# Altium PCB PCB_国产飞控 led端子 copy copy.pcbdoc (part 1 of 2)
Units mil, origin at the board's own origin, x right, y up, seen from the top; angles counter-clockwise.
Board outline 3467.18 x 2997.13 mil, 4 copper layers (Top Layer, Inner1, Inner2, Bottom Layer), stack 2.757 mil thick; 107 components, 163 nets, 527 pads, 148 vias.
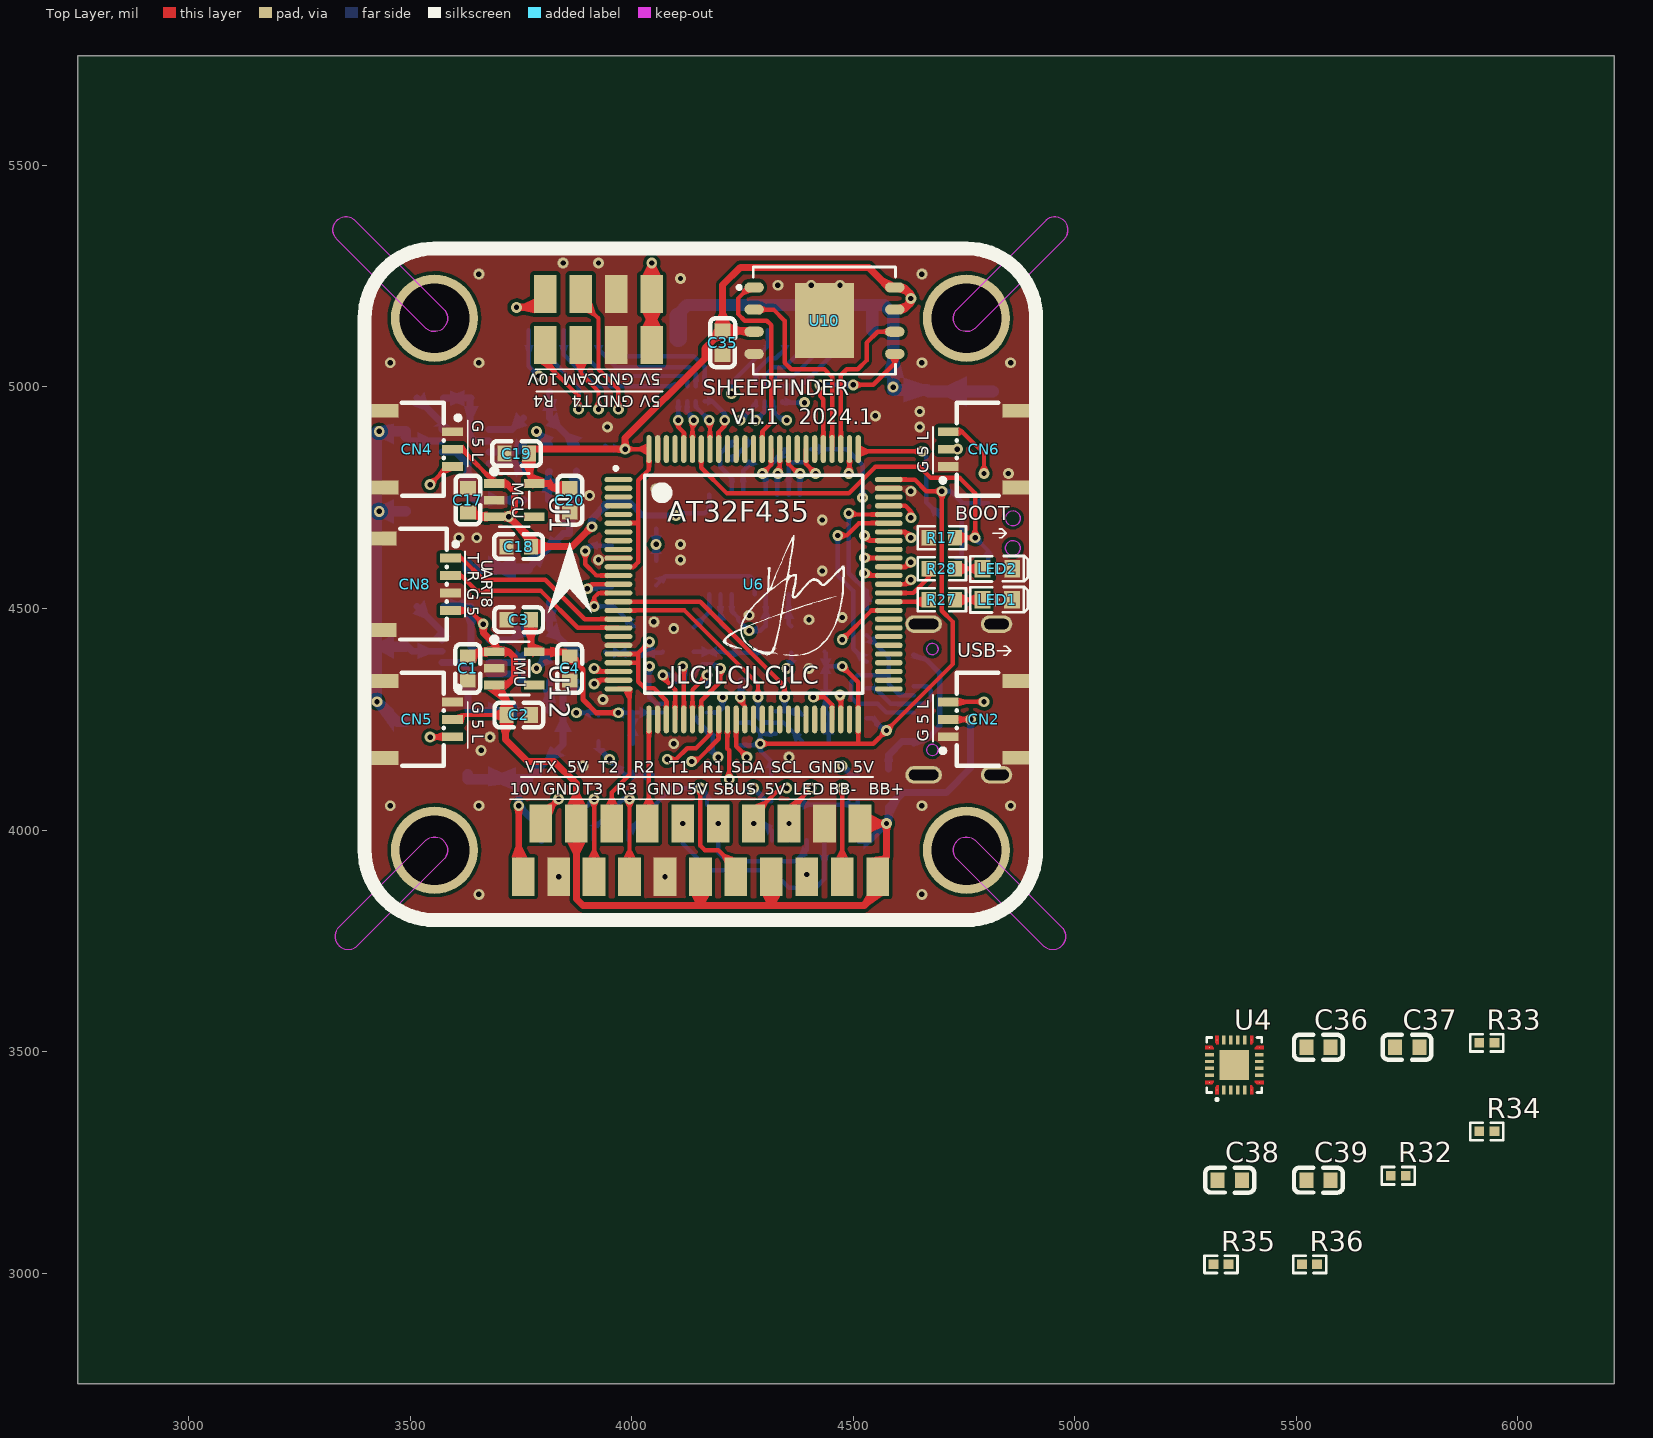
[diagram p0: Top Layer view]
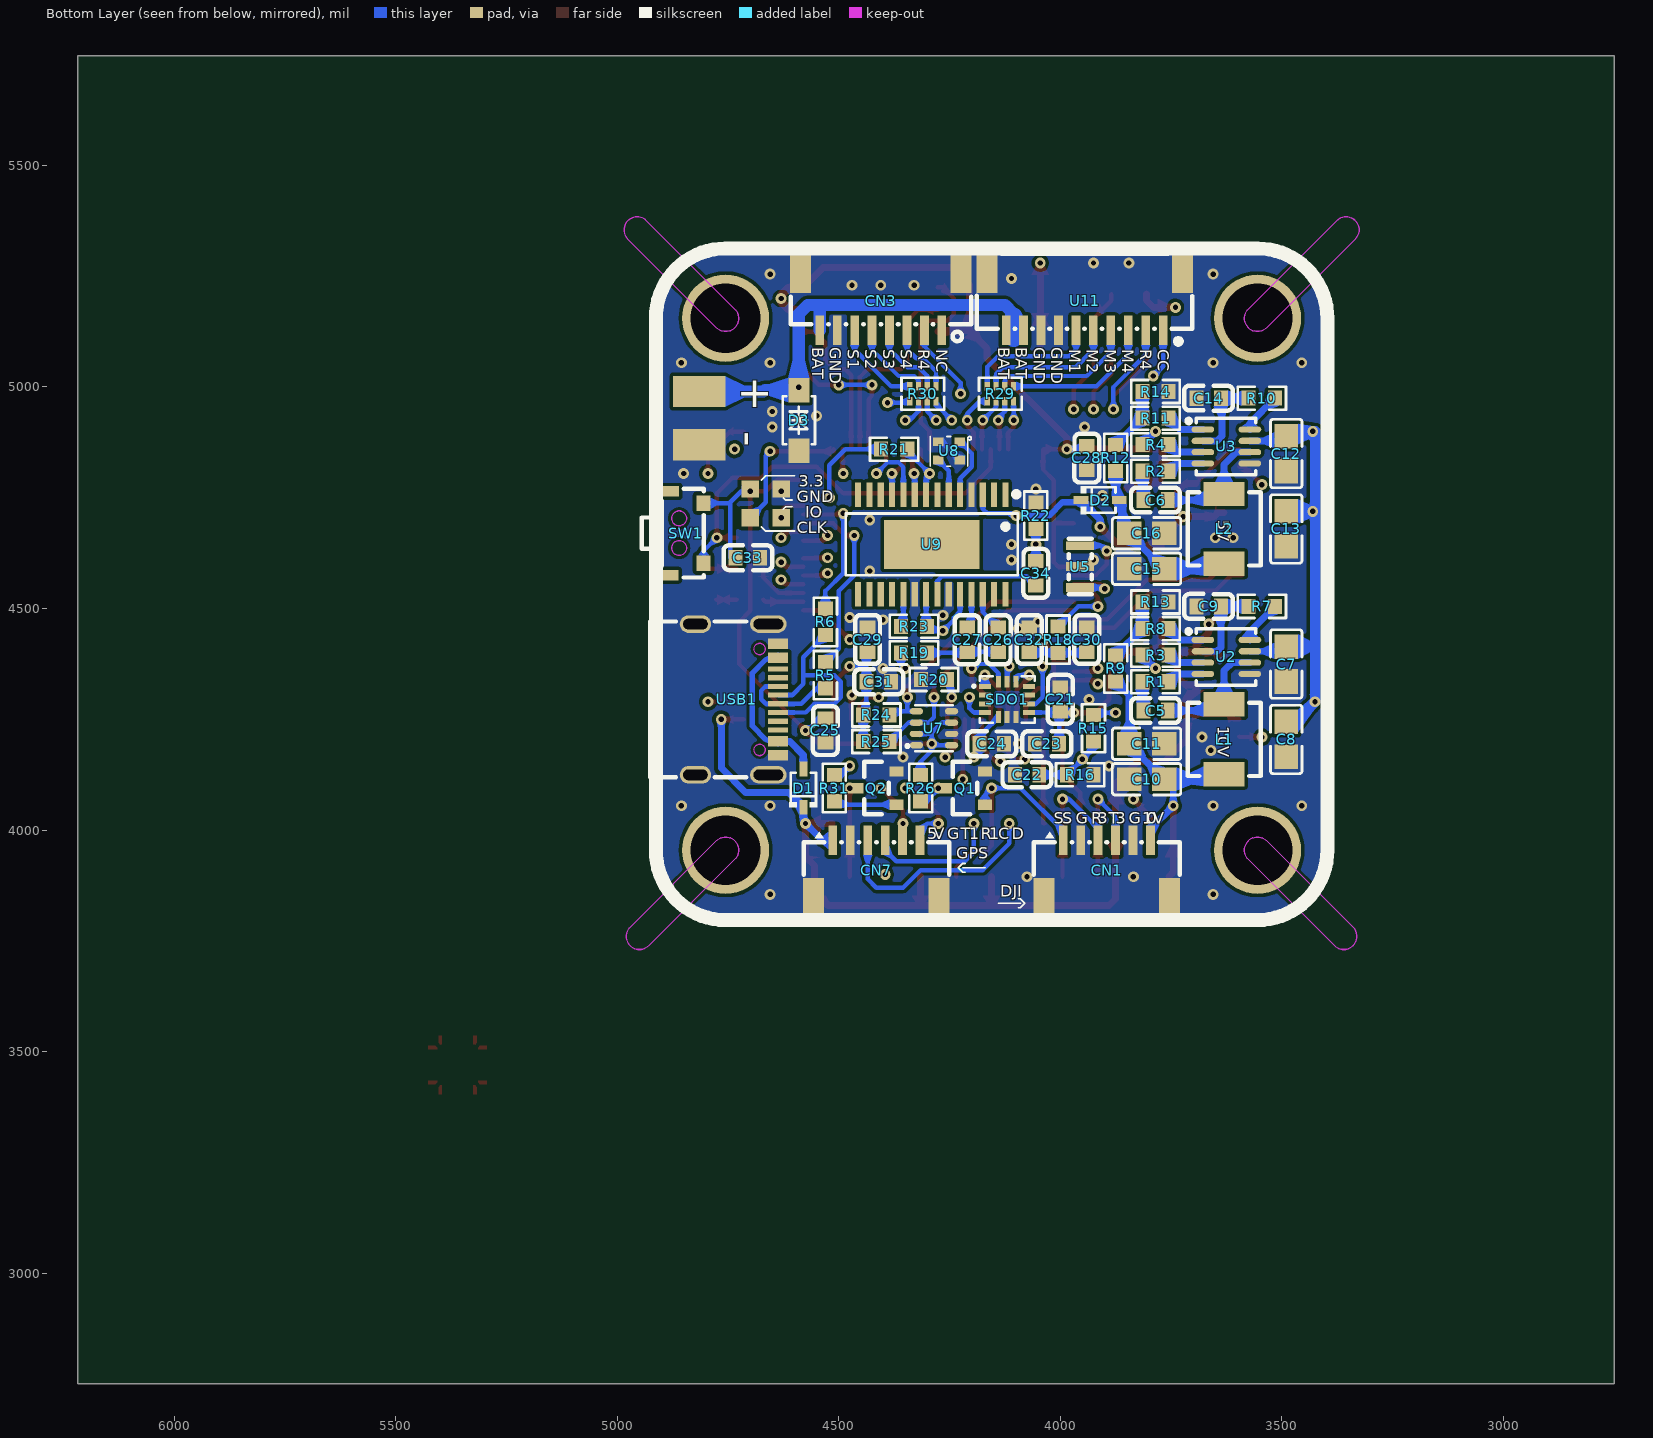
[diagram p1: Bottom Layer view, seen from below]
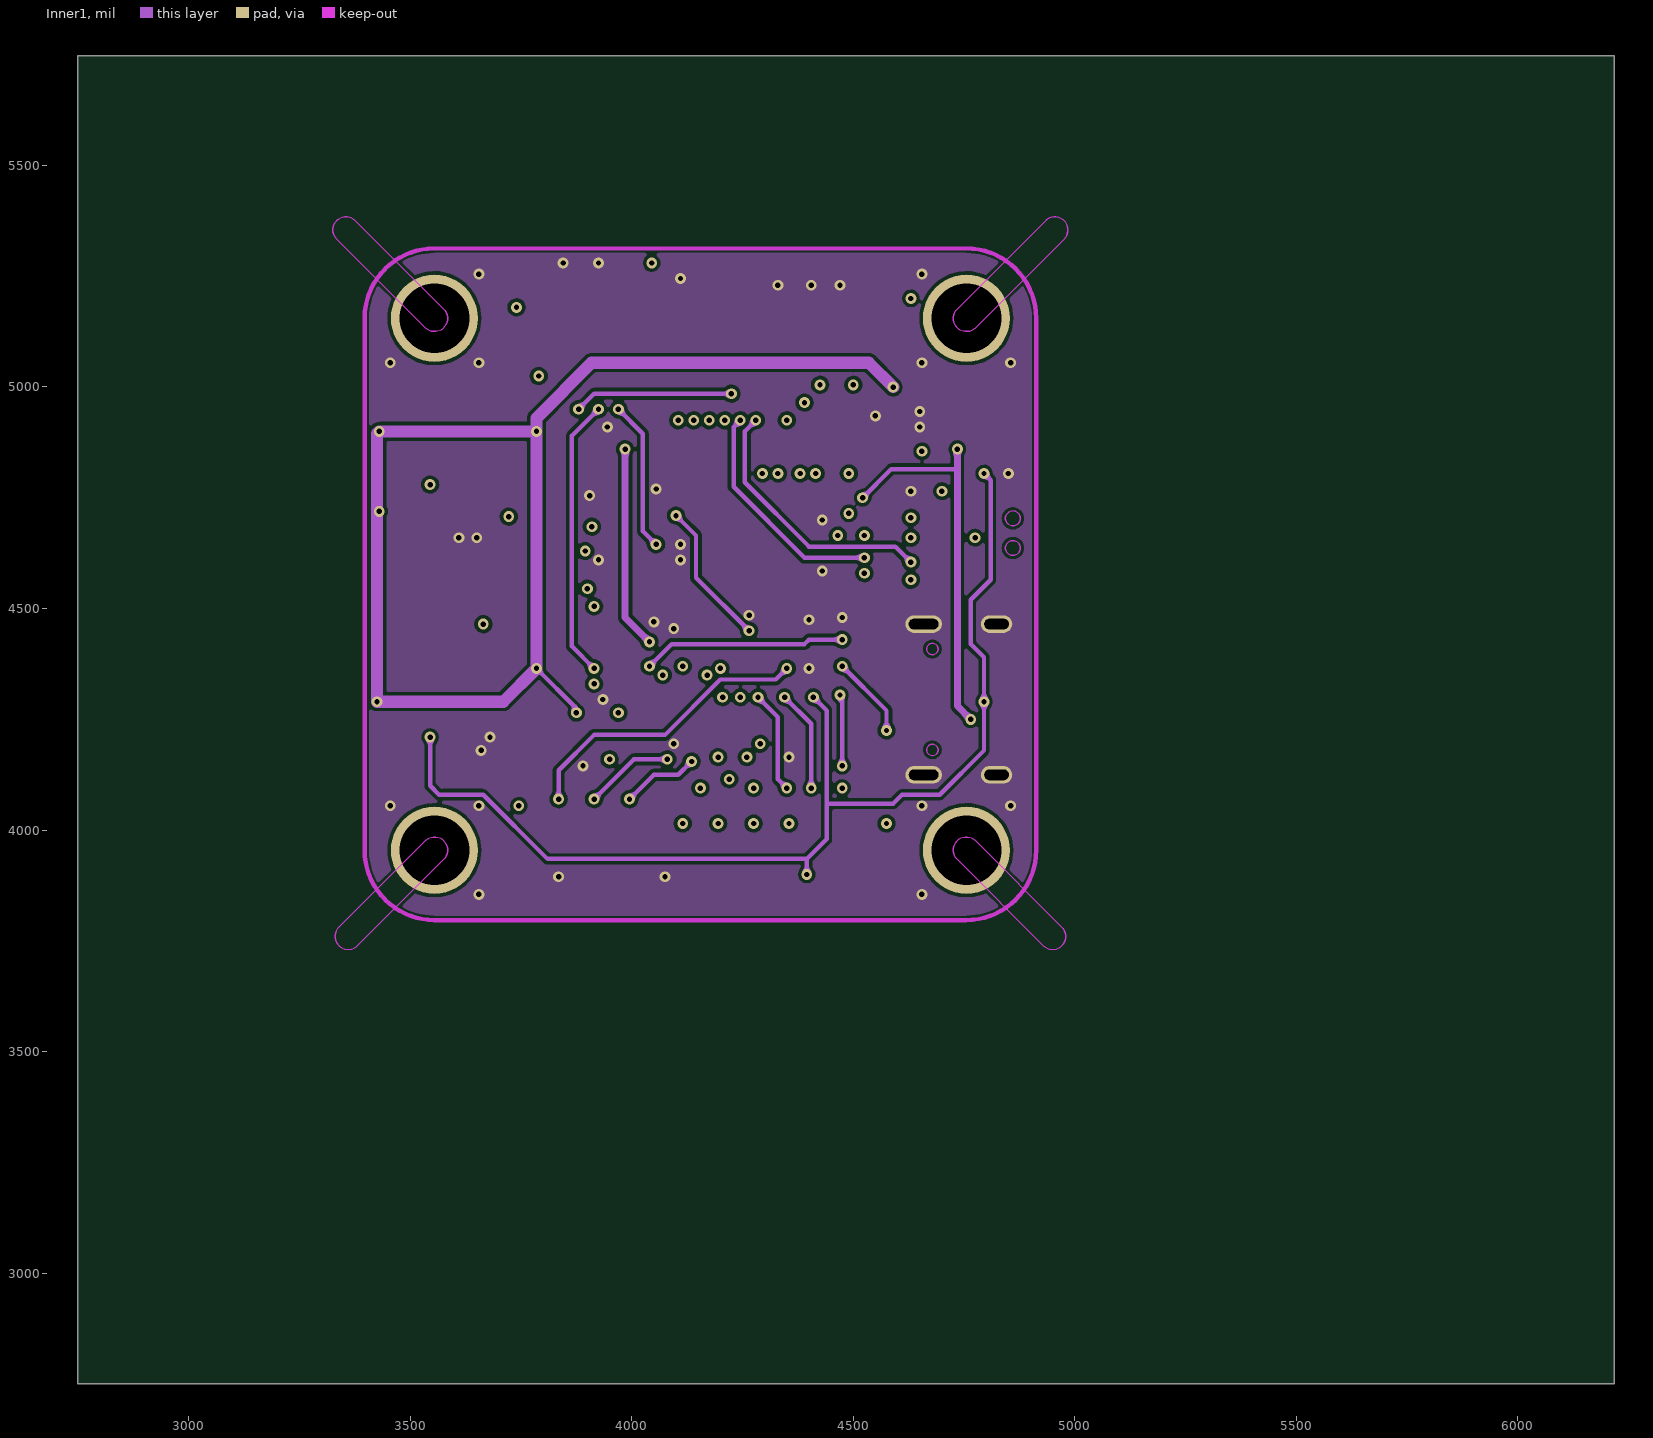
[diagram p2: Inner1]
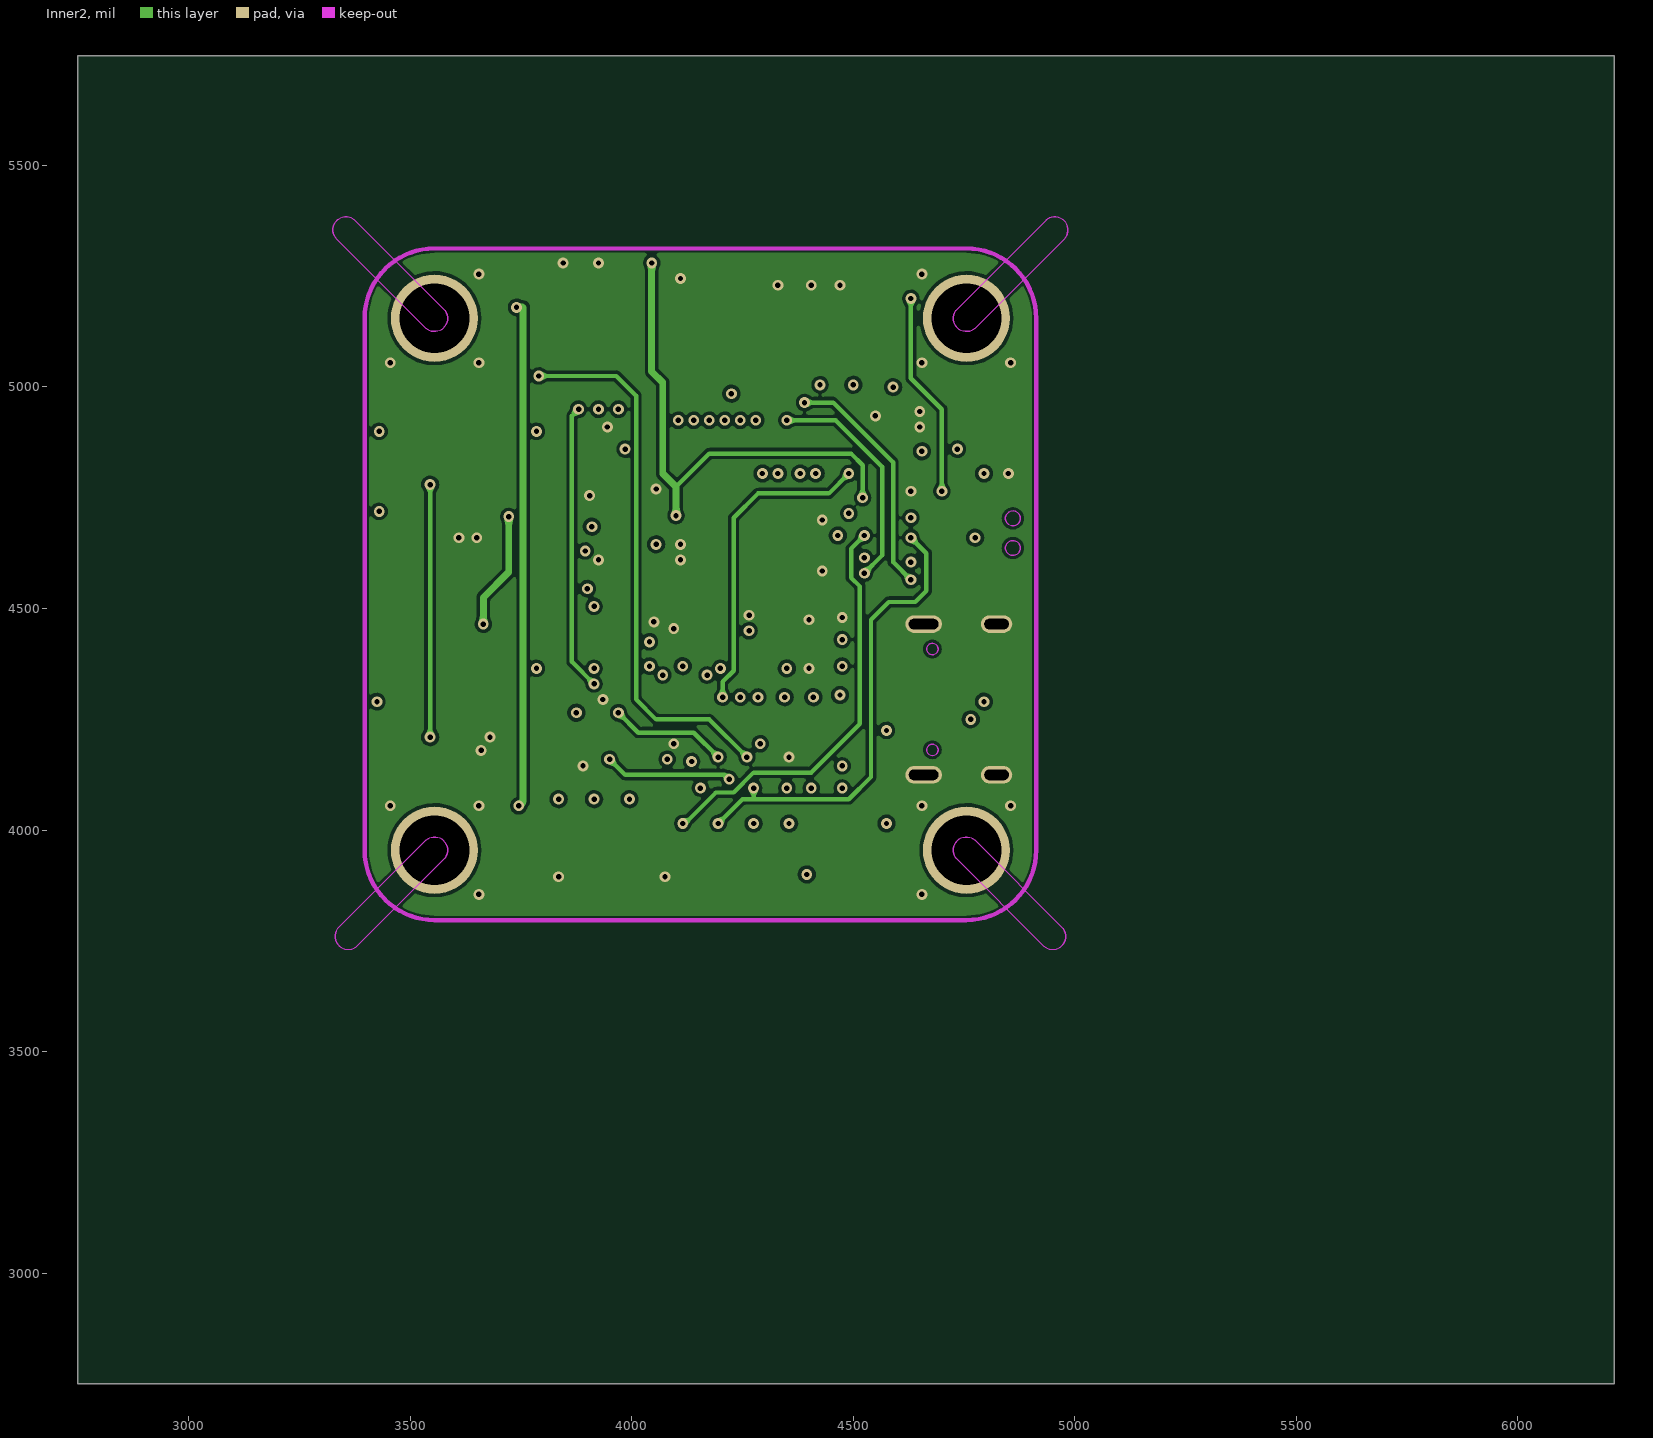
[diagram p3: Inner2]

## Layer stack, top to bottom
Top Solder Mask Layer: solder mask 0.394, Dk 3.3
Top Layer: signal copper 1.379
Inner1: signal copper (thickness not stored)
Inner2: signal copper (thickness not stored)
Bottom Layer: signal copper 1.378
Bottom Solder Mask Layer: solder mask 0.394, Dk 3.3

## Board outline
6217.18,2750 2750,2750 2750,5747.13 6217.18,5747.13

## Design rules (kind name [scope] priority, off if disabled: settings)
BoardOutlineClearance Default_1 [All] p1: gap=10 ignorepadtopadclearanceinfootprint=FALSE except(0: Arc-SplitContinuation Track-SplitContinuation SMDPad-SplitContinuation THPad-SplitContinuation Via-SplitContinuation Fill-SplitContinuation Poly-SplitContinuation Region-SplitContinuation Text-SplitContinuation)
BoardOutlineClearance otherClearance_1 [All] p2: gap=10 ignorepadtopadclearanceinfootprint=FALSE except(0: Arc-SplitContinuation Track-SplitContinuation SMDPad-SplitContinuation THPad-SplitContinuation Via-SplitContinuation Fill-SplitContinuation Poly-SplitContinuation Region-SplitContinuation Text-SplitContinuation)
Clearance Default [All] p1: gap=7 ignorepadtopadclearanceinfootprint=FALSE
Clearance otherClearance [All] p2: gap=7 ignorepadtopadclearanceinfootprint=FALSE
DiffPairsRouting differentialPair [All] p1: maxlimit=5 minlimit=5 mostfreqgap=6 toplayer_minwidth=5 toplayer_maxwidth=100 toplayer_prefwidth=100 midlayer1_minwidth=5 midlayer1_maxwidth=100 midlayer1_prefwidth=100 midlayer2_minwidth=5 midlayer2_maxwidth=100 midlayer2_prefwidth=100 bottomlayer_minwidth=5 bottomlayer_maxwidth=100 bottomlayer_prefwidth=100 maxuncoupledlength=10
PasteMaskExpansion pasteMaskExpansion [All] p1: expansion=0
PlaneConnect innerPlane [All] p1: planeconnectstyle=Relief reliefexpansion=20 reliefentries=4 reliefconductorwidth=10 reliefairgap=10
PolygonConnect copperRegion [All] p1: connectstyle=Relief reliefconductorwidth=10 reliefentries=4 polygonreliefangle="90 Angle" airgapwidth=10
RoutingVias Default_3 [All] p1: holewidth=12.01 width=12.01 viastyle="Through Hole" minholewidth=12.01 minwidth=12.01 maxholewidth=1181 maxwidth=1181
SolderMaskExpansion Common [All] p1: expansion=2 istentingtop=FALSE useseparateexpansions=TRUE expansionbottom=2 istentingbottom=FALSE
Width Default_2 [All] p1: maxlimit=1000 minlimit=10 preferedwidth=10
27 further rules are at their usual default settings.

## Components (designator, comment, footprint, x,y, rotation, side; value= is the part's Value field where it differs from the comment)
C1 "100nF" C0603 3630,4364.63 r90 top
C2 "10uF" C0603 3745,4259.63 r180 top
C3 "10uF" C0603 3745,4474.63 r0 top
C4 "100nF" C0603 3860,4364.63 r90 top
C5 "100nF" C0603 3785,4269.63 r180 bottom
C6 "100nF" C0603 3785,4744.63 r180 bottom
C7 "22u" C0805 3490,4374.63 r90 bottom
C8 "22u" C0805 3490,4204.63 r90 bottom
C9 "100nF" C0603 3665,4504.63 r180 bottom
C10 "22u" C0805 3805,4114.63 r180 bottom
C11 "22u" C0805 3805,4194.63 r0 bottom
C12 "22u" C0805 3490,4849.63 r90 bottom
C13 "22u" C0805 3490,4679.63 r90 bottom
C14 "100nF" C0603 3665,4974.63 r180 bottom
C15 "22u" C0805 3805,4589.63 r180 bottom
C16 "22u" C0805 3805,4669.63 r0 bottom
C17 "100nF" C0603 3630.3,4744.63 r270 top
C18 "10uF" C0603 3744.7,4639.63 r0 top
C19 "10uF" C0603 3740.3,4849.63 r0 top
C20 "100nF" C0603 3860.3,4744.63 r90 top
C21 "10nF" C0603 4000,4294.63 r270 bottom
C22 "100nF" C0603 4075,4124.63 r180 bottom
C23 "100nF" C0603 4030,4194.63 r180 bottom
C24 "2.2uF" C0603 4155,4194.63 r0 bottom
C25 "100nF" C0603 4530,4224.63 r90 bottom
C26 "10uF" C0603 4140,4429.63 r90 bottom
C27 "10uF" C0603 4210,4429.63 r90 bottom
C28 "100nF" C0603 3940,4839.63 r90 bottom
C29 "100nF" C0603 4435,4429.63 r270 bottom
C30 "100nF" C0603 3940,4429.63 r270 bottom
C31 "100nF" C0603 4410,4334.63 r0 bottom
C32 "100nF" C0603 4070,4429.63 r270 bottom
C33 "100nF" C0603 4705,4614.63 r0 bottom
C34 "100nF" C0603 4055,4579.63 r90 bottom
C35 "100nF" C0603 4205,5099.63 r270 top
C36 "100nF" C0603 5550,3509.63 r0 top
C37 "100nF" C0603 5750,3509.63 r0 top
C38 "100nF" C0603 5350,3209.63 r0 top
C39 "2.2uF" C0603 5550,3209.63 r0 top
CN1 "SH1.0X6P" CONN-SMD_6P-P1.00_MEGASTAR_ZX-SH1.0-6PWT 3895,3909.63 r180 bottom
CN2 "SH1.0-3P" CONN-SMD_3P-P1.00_HDGC_HDGC1002WR-S-3P 4795,4249.63 r90 top
CN3 "SH1.0X8P" CONN-SMD_8P-P1.00_WAFER-SH1.0-8PWB 4405,5194.63 r0 bottom
CN4 "SH1.0-3P" CONN-SMD_3P-P1.00_HDGC_HDGC1002WR-S-3P 3515,4859.63 r270 top
CN5 "SH1.0-3P" CONN-SMD_3P-P1.00_HDGC_HDGC1002WR-S-3P 3515,4249.63 r270 top
CN6 "SH1.0-3P" CONN-SMD_3P-P1.00_HDGC_HDGC1002WR-S-3P 4795,4859.63 r90 top
CN7 "SH1.0X6P" CONN-SMD_6P-P1.00_MEGASTAR_ZX-SH1.0-6PWT 4415,3909.63 r180 bottom
CN8 "HDGC1002WR-S-4P" CONN-SMD_4P-P1.00_HDGC_HDGC1002WR-S-4P 3510,4554.63 r270 top
D1 "B5817WS-MS" SOD-323_L1.7-W1.3-LS2.7-FD 4580,4094.63 r270 bottom
D2 "B5817WS-MS" SOD-323_L1.7-W1.3-LS2.7-FD 3910,4744.63 r0 bottom
D3 "SMF28CA" SOD-123_L2.7-W1.8-LS3.7-BI 4590,4924.63 r270 bottom
L1 "10uH" IND-SMD_L4.4-W4.0_PHC0420 3630,4204.63 r270 bottom
L2 "10uH" IND-SMD_L4.4-W4.0_PHC0420 3630,4679.63 r270 bottom
LED1 "LED-0603_G" LED0603_GREEN 4825,4519.63 r0 top
LED2 "LED-0603_B" LED0603_BLUE 4825.03,4589.6 r0 top
Q1 "S8050LT1-J3Y" SOT-23_L2.9-W1.3-P1.90-LS2.4-BR 4215,4094.63 r180 bottom
Q2 "S8050LT1-J3Y" SOT-23_L2.9-W1.3-P1.90-LS2.4-BR 4415,4094.63 r180 bottom
R1 "20R" R0603 3785,4334.63 r0 bottom
R2 "20R" R0603 3785,4809.63 r0 bottom
R3 "1M" R0603 3785,4394.63 r0 bottom
R4 "1M" R0603 3785,4869.63 r0 bottom
R5 "22R" R0603 4530,4349.63 r90 bottom
R6 "22R" R0603 4530,4469.63 r90 bottom
R7 "100k" R0603 3545,4504.63 r180 bottom
R8 "51k" R0603 3785,4454.63 r0 bottom
R9 "41.2k" R0603 3875,4364.63 r270 bottom
R10 "100k" R0603 3545,4974.63 r180 bottom
R11 "51k" R0603 3785,4929.63 r0 bottom
R12 "41.2k" R0603 3875,4839.63 r270 bottom
R13 "3.6k" R0603 3785,4514.63 r0 bottom
R14 "7.68k" R0603 3785,4989.63 r0 bottom
R15 "10k" R0603 3925,4229.63 r90 bottom
R16 "1k" R0603 3955,4124.63 r0 bottom
R17 "10k" R0603 4700,4659.63 r180 top
R18 "10k" R0603 4005,4429.63 r270 bottom
R19 "75R" R0603 4330,4399.63 r0 bottom
R20 "10k" R0603 4285,4339.63 r180 bottom
R21 "10k" R0603 4375,4859.63 r180 bottom
R22 "75R" R0603 4055,4709.63 r270 bottom
R23 "10k" R0603 4330,4459.63 r180 bottom
R24 "4K7" R0603 4415,4259.63 r0 bottom
R25 "4K7" R0603 4415,4199.63 r0 bottom
R26 "1k" R0603 4315,4094.63 r90 bottom
R27 "1k" R0603 4700,4519.63 r180 top
R28 "1k" R0603 4700,4589.63 r180 top
R29 "100*4" RES-ARRAY-SMD_0402-8P-L2.0-W1.0-BL 4135,4984.63 r0 bottom
R30 "100*4" RES-ARRAY-SMD_0402-8P-L2.0-W1.0-BL 4310,4984.63 r0 bottom
R31 "1k" R0603 4510,4094.63 r270 bottom
R32 "10kΩ" R0402 5730,3219.63 r0 top
R33 "10kΩ" R0402 5930,3519.63 r0 top
R34 "10kΩ" R0402 5930,3319.63 r0 top
R35 "10kΩ" R0402 5330,3019.63 r0 top
R36 "10kΩ" R0402 5530,3019.63 r0 top
SDO1 "BMI270" LGA-14_L3.0-W2.5-P0.50-TL 4120,4294.63 r180 bottom
SW1 "TS-1073B-A2B2-D4" KEY-SMD_TS-1073B-A2B2-D4 4845,4669.63 r90 bottom
U1 "SPX3819M5-L-3-3/TR" SOT-23-5_L3.0-W1.7-P0.95-LS2.8-BL 3735,4744.63 r270 top
U2 "MP9943" QFN-8-3X3 3625,4389.63 r180 bottom
U3 "MP9943" QFN-8-3X3 3625,4864.63 r180 bottom
U4 "MPU6500" QFN-24_L3.0-W3.0-P0.40-BL-EP 5360,3469.63 r0 top
U5 "8M/3213" X3213 3955,4594.63 r90 bottom
U6 "AT32F437VMT7-LQFP100" LQFP-100_L14.0-W14.0-P0.50-LS16.0-TL 4275,4554.63 r0 top
U7 "BMP280" SENSOR-TH_BMP280-BL 4285,4229.63 r180 bottom
U8 "2016晶振/27M" ? 4250,4854.63 r0 bottom
U9 "AT7456E" TSSOP-28_L9.7-W4.4-P0.65-LS6.4-BL-EP5.5 4290,4644.63 r0 bottom
U10 "W25N01GVZEIG" WSON-8_L8.0-W6.10-P1.27-EP 4435,5149.63 r0 top
U11 "ZX-SH1.0-10PWT" CONN-SMD_10P-P1.00_ZX-SH1.0-10PWT 3945,5194.63 r0 bottom locked
U12 "SPX3819M5-L-3-3/TR" SOT-23-5_L3.0-W1.7-P0.95-LS2.8-BL 3735,4364.63 r270 top
USB1 "TYPEC-304A-16L" USB-C-SMD_XUNPU_TYPEC-304A-ACP16L 4730,4294.63 r270 bottom

## Footprints (in the part's own frame and the unit in brackets; to place one, negate y for a bottom-side part, rotate by r counter-clockwise, add the part's x,y. Pads: shape width x height; smd on the part's side, far side on the other; paste and mask are expansions set on the pad)
C0603 [mm]
  rect 0.8x0.9 smd paste+0 mask+0.051: 1(-0.7,0) 2(0.7,0)
  silkscreen extent -1.41,-0.71 1.39,0.72
C0805 [mm]
  rect 1.41x1.35 smd paste-100 mask+0.051: 1(-1,0) 2(1,0)
  silkscreen extent -1.96,-0.9 1.96,0.9
CONN-SMD_3P-P1.00_HDGC_HDGC1002WR-S-3P [mm]
  rect 0.5x1.2 smd paste+0 mask+0.05: 1(-1,2.05) 2(0,2.05) 3(1,2.05)
  rect 0.8x2 smd paste+0 mask+0.05: 4(2.2,-2.05) 5(-2.2,-2.05)
  silkscreen extent -2.67,-2.72 2.67,2.48
CONN-SMD_4P-P1.00_HDGC_HDGC1002WR-S-4P [mm]
  rect 0.5x1.2 smd paste+0 mask+0.05: 1(-1.5,2.05) 2(-0.5,2.05) 3(0.5,2.05) 4(1.5,2.05)
  rect 0.8x2 smd paste+0 mask+0.05: 5(2.625,-2.05) 6(-2.625,-2.05)
  silkscreen extent -3.18,-2.72 3.17,2.49
CONN-SMD_6P-P1.00_MEGASTAR_ZX-SH1.0-6PWT [mm]
  rect 0.5x1.7 smd paste+0 mask+0.05: 1(-2.5,1.7) 2(-1.5,1.7) 3(-0.5,1.7) 4(0.5,1.7) 5(1.5,1.7) 6(2.5,1.7)
  rect 1.2x2.5 smd paste+0 mask+0.05: 7(3.6,-1.7) 8(-3.6,-1.7)
  silkscreen extent -4.17,-2.7 4.18,2.21
CONN-SMD_8P-P1.00_WAFER-SH1.0-8PWB [mm]
  rect 0.5x1.7 smd paste+0 mask+0.05: 1(-3.5,1.7) 2(-2.5,1.7) 3(-1.5,1.7) 4(-0.5,1.7) 5(0.5,1.7) 6(1.5,1.7) 7(2.5,1.7) 8(3.5,1.7)
  rect 1.2x2.5 smd paste+0 mask+0.05: 9(-4.6,-1.7) 10(4.6,-1.7)
  silkscreen extent -5.17,-2.95 5.17,2.32
CONN-SMD_10P-P1.00_ZX-SH1.0-10PWT [mm]
  rect 0.5x1.7 smd paste+0 mask+0.05: 1(-4.5,1.7) 2(-3.5,1.7) 3(-2.5,1.7) 4(-1.5,1.7) 5(-0.5,1.7) 6(0.5,1.7) 7(1.5,1.7) 8(2.5,1.7) 9(3.5,1.7) 10(4.5,1.7)
  rect 1.2x2.5 smd paste+0 mask+0.05: 11(5.6,-1.7) 12(-5.6,-1.7)
  silkscreen extent -6.18,-2.7 6.18,2.64
IND-SMD_L4.4-W4.0_PHC0420 [mm]
  rect 1.4x2.35 smd paste+0 mask+0.051: 1(-2,0) 2(2,0)
  silkscreen extent -2.1,-2.1 2.1,2.1
KEY-SMD_TS-1073B-A2B2-D4 [mm]
  rect 0.9x0.8 smd paste+0 mask+0.051: 1(-1.718,-1.013) 2(1.732,-1.013)
  rect 0.6x1.2 smd paste+0 mask+0.051: 3(-2.407,1.013) 4(2.407,0.987)
  Board Outline Layer circle w0.003: c0.857,0.387 r0.425
  Board Outline Layer circle w0.003: c-0.843,0.387 r0.425
  Board Outline Layer region: 0.857,0.812 0.772,0.812 0.616,0.747 0.496,0.627 0.432,0.471 0.432,0.302 0.496,0.146 0.616,0.026 0.772,-0.038 0.857,-0.038 0.941,-0.038 1.097,0.026 1.217,0.146 1.282,0.302 1.282,0.471 1.217,0.627 1.097,0.747 0.941,0.812 0.857,0.812
  Board Outline Layer region: 0.857,0.812 0.772,0.812 0.616,0.747 0.496,0.627 0.432,0.471 0.432,0.302 0.496,0.146 0.616,0.026 0.772,-0.038 0.857,-0.038 0.941,-0.038 1.097,0.026 1.217,0.146 1.282,0.302 1.282,0.471 1.217,0.627 1.097,0.747 0.941,0.812 0.857,0.812
  Board Outline Layer region: -0.843,0.812 -0.928,0.812 -1.084,0.747 -1.204,0.627 -1.268,0.471 -1.268,0.302 -1.204,0.146 -1.084,0.026 -0.928,-0.038 -0.843,-0.038 -0.759,-0.038 -0.603,0.026 -0.483,0.146 -0.418,0.302 -0.418,0.471 -0.483,0.627 -0.603,0.747 -0.759,0.812 -0.843,0.812
  Board Outline Layer region: -0.843,0.812 -0.928,0.812 -1.084,0.747 -1.204,0.627 -1.268,0.471 -1.268,0.302 -1.204,0.146 -1.084,0.026 -0.928,-0.038 -0.843,-0.038 -0.759,-0.038 -0.603,0.026 -0.483,0.146 -0.418,0.302 -0.418,0.471 -0.483,0.627 -0.603,0.747 -0.759,0.812 -0.843,0.812
  silkscreen extent -2.53,-1.03 2.55,2.53
LED0603_BLUE [mm]
  rect 0.9x1 smd paste+0 mask+0.051: 1(-0.85,0) 2(0.85,0)
  silkscreen extent -1.54,-0.73 1.75,0.73
LED0603_GREEN [mm]
  rect 0.9x1 smd paste+0 mask+0.051: 1(-0.85,0) 2(0.85,0)
  silkscreen extent -1.54,-0.73 1.75,0.73
LGA-14_L3.0-W2.5-P0.50-TL [mm]
  rect 0.675x0.28 smd paste+0 mask+0.051: 1(-1.262,0.75) 2(-1.262,0.25) 3(-1.262,-0.25) 4(-1.262,-0.75) 8(1.262,-0.75) 9(1.262,-0.25) 10(1.262,0.25) 11(1.262,0.75)
  rect 0.28x0.675 smd paste+0 mask+0.051: 5(-0.5,-1.012) 6(0,-1.012) 7(0.5,-1.012) 12(0.5,1.012) 13(0,1.012) 14(-0.5,1.012)
  silkscreen extent -1.98,-1.33 1.58,1.33
LQFP-100_L14.0-W14.0-P0.50-LS16.0-TL [mm]
  oval 1.6x0.3 smd paste+0 mask+0.051: 1(-7.75,6) 2(-7.75,5.5) 3(-7.75,5) 4(-7.75,4.5) 5(-7.75,4) 6(-7.75,3.5) 7(-7.75,3) 8(-7.75,2.5) 9(-7.75,2) 10(-7.75,1.5) 11(-7.75,1) 12(-7.75,0.5) 13(-7.75,0) 14(-7.75,-0.5) 15(-7.75,-1) 16(-7.75,-1.5) 17(-7.75,-2) 18(-7.75,-2.5) 19(-7.75,-3) 20(-7.75,-3.5) 21(-7.75,-4) 22(-7.75,-4.5) 23(-7.75,-5) 24(-7.75,-5.5) 25(-7.75,-6) 51(7.75,-6) 52(7.75,-5.5) 53(7.75,-5) 54(7.75,-4.5) 55(7.75,-4) 56(7.75,-3.5) 57(7.75,-3) 58(7.75,-2.5) 59(7.75,-2) 60(7.75,-1.5) 61(7.75,-1) 62(7.75,-0.5) 63(7.75,0) 64(7.75,0.5) 65(7.75,1) 66(7.75,1.5) 67(7.75,2) 68(7.75,2.5) 69(7.75,3) 70(7.75,3.5) 71(7.75,4) 72(7.75,4.5) 73(7.75,5) 74(7.75,5.5) 75(7.75,6)
  oval 0.3x1.6 smd paste+0 mask+0.051: 26(-6,-7.75) 27(-5.5,-7.75) 28(-5,-7.75) 29(-4.5,-7.75) 30(-4,-7.75) 31(-3.5,-7.75) 32(-3,-7.75) 33(-2.5,-7.75) 34(-2,-7.75) 35(-1.5,-7.75) 36(-1,-7.75) 37(-0.5,-7.75) 38(0,-7.75) 39(0.5,-7.75) 40(1,-7.75) 41(1.5,-7.75) 42(2,-7.75) 43(2.5,-7.75) 44(3,-7.75) 45(3.5,-7.75) 46(4,-7.75) 47(4.5,-7.75) 48(5,-7.75) 49(5.5,-7.75) 50(6,-7.75) 76(6,7.75) 77(5.5,7.75) 78(5,7.75) 79(4.5,7.75) 80(4,7.75) 81(3.5,7.75) 82(3,7.75) 83(2.5,7.75) 84(2,7.75) 85(1.5,7.75) 86(1,7.75) 87(0.5,7.75) 88(0,7.75) 89(-0.5,7.75) 90(-1,7.75) 91(-1.5,7.75) 92(-2,7.75) 93(-2.5,7.75) 94(-3,7.75) 95(-3.5,7.75) 96(-4,7.75) 97(-4.5,7.75) 98(-5,7.75) 99(-5.5,7.75) 100(-6,7.75)
  silkscreen extent -8,-6.25 6.25,6.75
QFN-8-3X3 [mm]
  oval 1.3x0.35 smd paste+0 mask+0.051: 1(-1.349,1.001) 2(-1.349,0.351) 3(-1.349,-0.3) 4(-1.349,-0.95) 5(1.346,-0.95) 6(1.346,-0.3) 7(1.346,0.351) 8(1.349,1.001)
  silkscreen extent -2.29,-1.6 1.68,1.64
QFN-24_L3.0-W3.0-P0.40-BL-EP [mm]
  round 0.04 smd: 1(-1,-1.428) 6(1,-1.428) 7(1.428,-1) 12(1.428,1) 13(1,1.428) 18(-1,1.428) 19(-1.428,1) 24(-1.428,-1)
  rect 0.2x0.505 smd paste-100 mask+0.051: 2(-0.6,-1.428) 3(-0.2,-1.428) 4(0.2,-1.428) 5(0.6,-1.428) 14(0.6,1.428) 15(0.2,1.428) 16(-0.2,1.428) 17(-0.6,1.428)
  rect 0.505x0.2 smd paste-100 mask+0.051: 8(1.428,-0.6) 9(1.428,-0.2) 10(1.428,0.2) 11(1.428,0.6) 20(-1.428,0.6) 21(-1.428,0.2) 22(-1.428,-0.2) 23(-1.428,-0.6)
  rect 1.7x1.7 smd paste-100 mask+0.051: 25(0,0)
  Top Layer region: -1.68,1.1 -1.274,1.1 -1.174,1 -1.175,0.9 -1.68,0.9
  Top Layer region: 1.1,-1.68 0.9,-1.68 0.9,-1.175 1,-1.175 1.1,-1.275
  Top Layer region: -1.1,-1.68 -0.9,-1.68 -0.9,-1.175 -1,-1.174 -1.1,-1.275
  Top Layer region: 1.1,1.68 0.9,1.68 0.9,1.175 1,1.174 1.1,1.274
  Top Layer region: 1.68,1.1 1.274,1.1 1.174,1 1.175,0.9 1.68,0.9
  Top Layer region: 1.68,-1.1 1.275,-1.1 1.175,-1 1.175,-0.9 1.68,-0.9
  Top Layer region: -1.68,-1.1 -1.274,-1.1 -1.174,-1 -1.175,-0.9 -1.68,-0.9
  Top Layer region: -1.1,1.68 -0.9,1.68 -0.9,1.175 -1,1.174 -1.1,1.274
  silkscreen extent -1.58,-2.05 1.58,1.58
R0402 [mm]
  rect 0.566x0.54 smd paste-100 mask+0.051: 1(-0.433,0) 2(0.433,0)
  silkscreen extent -0.94,-0.5 0.94,0.5
R0603 [mil]
  rect 31.75x34.02 smd paste-3937.01 mask+2: 1(-29.66,0) 2(29.66,0)
  silkscreen extent -55,-26 55,26
RES-ARRAY-SMD_0402-8P-L2.0-W1.0-BL [mm]
  rect 0.3x0.505 smd paste+0 mask+0.051: 1(-0.75,0.427) 2(-0.25,0.427) 3(0.25,0.427) 4(0.75,0.427) 5(0.75,-0.427) 6(0.25,-0.427) 7(-0.25,-0.427) 8(-0.75,-0.427)
  silkscreen extent -1.23,-0.91 1.23,0.91
SENSOR-TH_BMP280-BL [mm]
  oval 0.767x0.364 smd paste+0 mask+0.051: 1(-1.008,-0.975) 2(-1.008,-0.325) 3(-1.008,0.325) 4(-1.008,0.975) 5(1.009,0.975) 6(1.009,0.325) 7(1.009,-0.325) 8(1.009,-0.975)
  silkscreen extent -1.61,-1.33 1.08,1.33
SOD-123_L2.7-W1.8-LS3.7-BI [mm]
  rect 1.4x1.2 smd paste+0 mask+0.051: 1(-1.735,0) 2(1.735,0)
  silkscreen extent -1.38,-0.93 1.38,0.93
SOD-323_L1.7-W1.3-LS2.7-FD [mm]
  rect 0.845x0.455 smd paste+0 mask+0.051: 1(-1.098,0) 2(1.098,0)
  silkscreen extent -0.88,-0.8 1.1,0.8
SOT-23-5_L3.0-W1.7-P0.95-LS2.8-BL [mm]
  rect 0.49x1.157 smd paste+0 mask+0.051: 1(-0.95,-1.154) 2(0,-1.154) 3(0.95,-1.154)
  rect 0.49x1.175 smd paste+0 mask+0.051: 4(0.95,1.154) 5(-0.95,1.154)
  silkscreen extent -1.8,-1.29 1.53,0.85
SOT-23_L2.9-W1.3-P1.90-LS2.4-BR [mm]
  rect 0.8x0.6 smd paste+0 mask+0.051: 1(1.15,-0.95) 2(1.15,0.95) 3(-1.15,0)
  silkscreen extent -0.7,-1.5 0.7,1.5
TSSOP-28_L9.7-W4.4-P0.65-LS6.4-BL-EP5.5 [mm]
  rect 0.35x1.4 smd paste+0 mask+0.051: 1(-4.225,-2.85) 2(-3.575,-2.85) 3(-2.925,-2.85) 4(-2.275,-2.85) 5(-1.625,-2.85) 6(-0.975,-2.85) 7(-0.325,-2.85) 8(0.325,-2.85) 9(0.975,-2.85) 10(1.625,-2.85) 11(2.275,-2.85) 12(2.925,-2.85) 13(3.575,-2.85) 14(4.225,-2.85) 15(4.225,2.85) 16(3.575,2.85) 17(2.925,2.85) 18(2.275,2.85) 19(1.625,2.85) 20(0.975,2.85) 21(0.325,2.85) 22(-0.325,2.85) 23(-0.975,2.85) 24(-1.625,2.85) 25(-2.275,2.85) 26(-2.925,2.85) 27(-3.575,2.85) 28(-4.225,2.85)
  rect 5.5x2.8 smd paste+0 mask+0.05: 29(0,0)
  silkscreen extent -5,-3.02 4.93,1.77
USB-C-SMD_XUNPU_TYPEC-304A-ACP16L [mm]
  oval 1x2.1 hole 0.6 slot 1.7 at 90 deg paste+0 mask+0.05: 25(4.32,1.807) 28(-4.32,1.808)
  oval 1x1.8 hole 0.6 slot 1.4 at 90 deg copper offset 0,0 paste+0 mask+0.05: 26(4.32,-2.373) 27(-4.32,-2.372)
  rect 0.3x1.15 smd paste-100 mask+0.05: A1(-3.35,2.373) A4(-2.55,2.373) A5(-1.25,2.373) A6(-0.25,2.373) A7(0.25,2.373) A8(1.25,2.373) A9(2.55,2.373) A12(3.35,2.373) B1(3.05,2.373) B4(2.25,2.373) B5(1.75,2.373) B6(0.75,2.373) B7(-0.75,2.373) B8(-1.75,2.373) B9(-2.25,2.373) B12(-3.05,2.373)
  Board Outline Layer circle w0.003: c2.89,1.308 r0.325
  Board Outline Layer circle w0.003: c-2.89,1.308 r0.325
  Board Outline Layer region: 2.89,0.983 2.955,0.983 3.074,1.032 3.166,1.124 3.215,1.243 3.215,1.372 3.166,1.492 3.074,1.583 2.955,1.633 2.89,1.633 2.825,1.633 2.706,1.583 2.614,1.492 2.565,1.372 2.565,1.243 2.614,1.124 2.706,1.032 2.825,0.983 2.89,0.983
  Board Outline Layer region: 2.89,0.983 2.955,0.983 3.074,1.032 3.166,1.124 3.215,1.243 3.215,1.372 3.166,1.492 3.074,1.583 2.955,1.633 2.89,1.633 2.825,1.633 2.706,1.583 2.614,1.492 2.565,1.372 2.565,1.243 2.614,1.124 2.706,1.032 2.825,0.983 2.89,0.983
  Board Outline Layer region: -2.89,0.983 -2.825,0.983 -2.706,1.032 -2.614,1.124 -2.565,1.243 -2.565,1.372 -2.614,1.492 -2.706,1.583 -2.825,1.633 -2.89,1.633 -2.955,1.633 -3.074,1.583 -3.166,1.492 -3.215,1.372 -3.215,1.243 -3.166,1.124 -3.074,1.032 -2.955,0.983 -2.89,0.983
  Board Outline Layer region: -2.89,0.983 -2.825,0.983 -2.706,1.032 -2.614,1.124 -2.565,1.243 -2.565,1.372 -2.614,1.492 -2.706,1.583 -2.825,1.633 -2.89,1.633 -2.955,1.633 -3.074,1.583 -3.166,1.492 -3.215,1.372 -3.215,1.243 -3.166,1.124 -3.074,1.032 -2.955,0.983 -2.89,0.983
  silkscreen extent -4.47,-4.97 4.47,0.54
WSON-8_L8.0-W6.10-P1.27-EP [mm]
  oval 1.115x0.581 smd paste+0 mask+0.051: 1(-4.033,1.905) 2(-4.033,0.635) 3(-4.033,-0.635) 4(-4.033,-1.905) 5(4.033,-1.905) 6(4.033,-0.635) 7(4.033,0.635) 8(4.033,1.905)
  rect 3.4x4.3 smd paste+0 mask+0.051: 9(0,0)
  silkscreen extent -4.99,-3.08 4.08,3.08
X3213 [mm]
  rect 0.5x1.6 smd paste+0 mask+0.051: 1(-1.199,0) 2(0,0) 3(1.199,0)
  silkscreen extent -1.6,-0.65 1.6,0.65
? [mm]
  rect 0.6x0.5 smd paste+0 mask+0.102: 1(-0.6,-0.55) 2(0.65,-0.55) 3(0.65,0.5) 4(-0.6,0.5)
  silkscreen extent -1.25,-0.85 1.1,0.85

## Free pads (board coordinates)
  rect 51.18x86.61 smd paste-3937.01 mask+2: 5(3755,3894.63) 5(3795,4014.63) 5(3805,5094.63) 5(3805,5209.63) 5(3835,3894.63) 5(3875,4014.63) 5(3885,5094.63) 5(3885,5209.63) 5(3915,3894.63) 5(3955,4014.63) 5(3965,5094.63) 5(3965,5209.63) 5(3995,3894.63) 5(4035,4014.63) 5(4045,5094.63) 5(4045,5209.63) 5(4075,3894.63) 5(4115,4014.63) 5(4155,3894.63) 5(4195,4014.63) 5(4235,3894.63) 5(4275,4014.63) 5(4315,3894.63) 5(4355,4014.63) 5(4395,3894.63) 5(4435,4014.63) 5(4475,3894.63) 5(4515,4014.63) 5(4555,3894.63)
  rect 39.37x39.37 smd far side paste-3937.01 mask+2: 5(4630,4704.63) 5(4630,4769.63) 5(4700,4704.63) 5(4700,4769.63)
  rect 118.11x70.87 smd far side paste-3937.01 mask+2: 5(4815,4869.63) 5(4815,4989.63)
  round 196.85 hole 157.48 paste+0 mask+1.97: 6(3554.61,5155.02) 6(3554.61,3954.24) 6(4755.39,3954.24) 6(4755.39,5155.02)

## Via types
v1: diameter 24.41, hole 12.2, Top Layer to Bottom Layer, 148 vias

## Nets (pads, with @x,y where several pads share a name; then routed paths per layer and width w, separated by ;. In a path a pad name is that pad's centre, name@x,y a point inside that pad or via, vN(x,y) a via of type N, cw(c..) or ccw(c..) an arc to the next point about the centre after c; other vN are vias at no path point)
1: pad.6@3554.61,5155.02
2: pad.6@4755.39,5155.02
3: pad.6@3554.61,3954.24
3V3-IMU: C3.2 C4.2 C21.2 C23.2 C24.2 C36.1 C37.1 C39.1 R34.2 R35.2 R36.2 SDO1.5 SDO1.8 U4.8 U4.13 U12.5 | length 911.9
  Top Layer w11.81: C4.2@3860,4392.19 3890,4362.23 3890,4294.63 3920,4264.63 v1(3970,4264.63)
  Top Layer w15.75: C3.2@3772.55,4474.63 3772.6,4415.63 3786.2,4402.03 3850.2,4402.03 C4.2@3860,4392.19
  Inner2 w10: v1(3970,4264.63) 4015,4219.63 4140,4219.63 v1(4195,4164.63)
  Bottom Layer w10: v1(3970,4264.63) 3994.1,4264.63 3994.5,4265.13 C21.2@4001.9,4265.13 ; C21.2@4000,4267.03 C21.2@4001.9,4265.13 ; C23.2@4002.45,4194.63 4002.4,4264.63 C21.2@4001.9,4265.13 ; SDO1.8@4070.32,4265.1 C21.2@4001.9,4265.13 ; SDO1.5@4139.7,4254.73 4182.6,4211.93 C24.2@4182.56,4194.63 4182.6,4177.03 v1(4195,4164.63)
4: pad.6@4755.39,3954.24
$2N1: CN3.6 R30.5 | length 202.7
  Bottom Layer w10: R30.5@4339.5,5001.43 4381.8,5001.43 4464.1,5083.73 CN3.6@4464.1,5127.73
$2N15: CN3.5 R30.6 | length 190.3
  Bottom Layer w10: R30.6@4319.8,5001.43 4319.8,5014.43 4330,5024.63 4365,5024.63 4424.7,5084.33 CN3.5@4424.68,5127.7
$2N17: CN3.4 R30.7 | length 176.2
  Bottom Layer w10: R30.7@4300.2,5001.43 4300.2,5024.83 4320,5044.63 4345,5044.63 4385.3,5084.93 CN3.4@4385.31,5127.7
$2N19: CN3.3 R30.8 | length 162.2
  Bottom Layer w10: R30.8@4280.5,5001.43 4280.5,5035.13 4310,5064.63 4325,5064.63 4345.9,5085.53 CN3.3@4345.94,5127.7
$2N21: R29.5 U11.6 | length 302.8
  Bottom Layer w10: U11.6@3964.68,5127.7 3964.7,5084.93 3980,5069.63 4140,5069.63 4164.5,5045.13 R29.5@4164.5,5001.43
$2N24: R29.6 U11.5 | length 313.9
  Bottom Layer w10: U11.5@3925.31,5127.7 3925.3,5084.33 3965,5044.63 4130,5044.63 4144.8,5029.83 R29.6@4144.8,5001.43
$2N26: R29.7 U11.4 | length 327.9
  Bottom Layer w10: U11.4@3885.94,5127.7 3885.9,5078.73 3940,5024.63 4115,5024.63 4125.2,5014.43 R29.7@4125.2,5001.43
$2N28: R29.8 U11.3 | length 343.3
  Bottom Layer w10: U11.3@3846.56,5127.7 3846.6,5073.03 3918.2,5001.43 R29.8@4105.5,5001.43
$2N34: C26.1 C27.1 R19.1 | length 162.7
  Bottom Layer w10: C26.1@4140,4402.03 4210,4402.03 4210,4399.63 R19.1@4300.34,4399.63
$2N35: C27.2 U9.25 | length 79.2
  Bottom Layer w10: U9.25@4200.43,4532.42 4200.4,4466.83 C27.2@4210,4457.19
$2N36: C26.2 U9.26 | length 89.6
  Bottom Layer w10: C26.2@4140,4457.19 4174.8,4492.03 U9.26@4174.84,4532.42
$2N52: LED2.1 R28.1 | length 61.8
  Top Layer w10: R28.1@4729.66,4589.63 LED2.1@4791.5,4589.63
$2N53: LED1.1 R27.1 | length 46.8
  Top Layer w10: R27.1@4729.66,4519.63 LED1.1@4776.5,4519.63
$2N64: R18.1 U6.14 | length 187.9
  Top Layer w10: v1(3915,4504.63) 3915,4524.63 3925.3,4534.93 U6.14@3969.89,4534.94
  Bottom Layer w10: v1(3915,4504.63) 3959.7,4504.63 R18.1@4005,4459.3
$2N83: R20.2 U6.37 | length 104.7
  Top Layer w10: v1(4245,4299.63) 4245,4290.23 4255.3,4279.93 U6.37@4255.32,4249.52
  Bottom Layer w10: v1(4245,4299.63) 4245,4339.63 R20.2@4255.34,4339.63
$2N124: U8.1 U9.5 | length 131.2
  Bottom Layer w10: U9.5@4226,4766.83 4226,4793.63 4200,4819.63 4200,4849.93 U8.1@4226.38,4876.28
$2N125: U8.3 U9.6 | length 78
  Bottom Layer w10: U9.6@4251.6,4766.83 4251.6,4810.93 U8.3@4275.6,4834.93
$2N130: R23.1 U9.19 | length 75.2
  Bottom Layer w10: U9.19@4353.98,4532.42 4354,4465.33 R23.1@4359.66,4459.63
$2N133: C34.1 U9.22 | length 265.2
  Bottom Layer w10: C34.1@4055,4552.03 4075.9,4572.93 4266.7,4572.93 4277.2,4562.43 U9.22@4277.21,4532.42
$2N182: Q2.1 R31.2 | length 147.9
  Bottom Layer w10: Q2.1@4369.8,4057.23 4510,4057.23 R31.2@4510,4064.93
$2N229: C5.2 L1.1 U2.6 | length 282.9
  Bottom Layer w15.75: U2.6@3572,4377.83 3611.8,4377.83 3630,4359.63 3630,4283.33 3630,4269.63 C5.2@3757.45,4269.63
$2N232: R8.2 R9.1 R13.2 | length 145.3
  Bottom Layer w15.75: R13.2@3814.66,4514.63 R8.2@3814.66,4454.63 R9.1@3875,4394.3
$2N233: R8.1 U2.1 | length 87.8
  Bottom Layer w15.75: U2.1@3678.1,4429.03 3729.7,4429.03 R8.1@3755.34,4454.63
$2N234: C5.1 R1.2 | length 65.9
  Bottom Layer w15.75: C5.1@3812.55,4269.63 3814.7,4271.73 R1.2@3814.66,4334.63
$2N235: R1.1 U2.4 | length 84.5
  Bottom Layer w15.75: U2.4@3678.1,4352.23 3737.7,4352.23 R1.1@3755.34,4334.63
$2N236: C9.2 R7.1 U2.2 | length 199.4
  Bottom Layer w15.75: R7.1@3574.66,4504.63 C9.2@3637.45,4504.63 3637.4,4412.23 3646.2,4403.43 U2.2@3678.1,4403.43
$2N237: R3.1 U2.3 | length 84.2
  Bottom Layer w15.75: U2.3@3678.1,4377.83 3738.5,4377.83 R3.1@3755.34,4394.63
$2N238: R7.2 U2.8 | length 99
  Bottom Layer w15.75: R7.2@3515.34,4504.63 3571.9,4448.03 U2.8@3571.9,4429.03
$2N239: R11.1 U3.1 | length 87.8
  Bottom Layer w15.75: U3.1@3678.1,4904.03 3729.7,4904.03 R11.1@3755.34,4929.63
$2N240: C14.2 R10.1 U3.2 | length 196.4
  Bottom Layer w15.75: R10.1@3574.66,4974.63 C14.2@3637.45,4974.63 3635,4972.23 3635,4889.63 3646.2,4878.43 U3.2@3678.1,4878.43
$2N241: R4.1 U3.3 | length 84.2
  Bottom Layer w15.75: U3.3@3678.1,4852.83 3738.5,4852.83 R4.1@3755.34,4869.63
$2N242: R2.1 U3.4 | length 84.5
  Bottom Layer w15.75: U3.4@3678.1,4827.23 3737.7,4827.23 R2.1@3755.34,4809.63
$2N244: C6.2 L2.1 U3.6 | length 269.1
  Bottom Layer w15.75: U3.6@3572,4852.83 3601.8,4852.83 3630,4824.63 3630,4758.33 3643.7,4744.63 C6.2@3757.45,4744.63
$2N246: R10.2 U3.8 | length 94
  Bottom Layer w15.75: R10.2@3515.34,4974.63 3571.9,4918.03 U3.8@3571.9,4904.03
$2N247: C6.1 R2.2 | length 65.9
  Bottom Layer w15.75: C6.1@3812.55,4744.63 3812.6,4807.53 R2.2@3814.66,4809.63
$2N248: R11.2 R12.1 R14.2 | length 145.3
  Bottom Layer w15.75: R14.2@3814.66,4989.63 R11.2@3814.66,4929.63 R12.1@3875,4869.3
$2N249: C15.2 C16.2 D2.1 L2.2 R12.2 | length 426.5
  Bottom Layer w15.75: C15.2@3765.63,4589.63 3844.4,4668.33 C16.2@3844.37,4669.63 3860,4669.63 3860,4737.83 D2.1@3866.79,4744.63 3875,4744.63 R12.2@3875,4809.93
  Bottom Layer w23.62: L2.2@3630,4600.89 3630,4589.63 C15.2@3765.63,4589.63
$2N284: U4.1
$2N285: U4.2
$2N286: U4.3
$2N287: U4.4
$2N288: U4.5
$2N289: U4.6
$2N290: U4.7
$2N293: C38.2 U4.10
$2N294: R32.2 U4.11
$2N297: U4.14
$2N298: U4.15
$2N299: U4.16
$2N300: U4.17
$2N302: U4.19
$2N303: U4.21
+5V: C1.2 C2.2 C17.2 C18.2 CN2.2 CN4.2 CN5.2 CN6.2 CN7.1 CN8.4 D1.2 D2.2 pad.5@3875,4014.63 pad.5@4045,5094.63 pad.5@4045,5209.63 pad.5@4155,3894.63 pad.5@4315,3894.63 pad.5@4515,4014.63 pad.5@4555,3894.63 R21.1 R23.2 U1.1 U1.3 U9.3 U9.21 U9.24 U12.1 U12.3 | length 6826.7
  Top Layer w10: CN5.2@3595.71,4249.63 3610,4249.63 3620,4259.63 C2.2@3717.45,4259.63 ; CN4.2@3595.71,4859.63 3616.2,4859.63 U1.1@3693.8,4782.03 ; CN2.2@4714.29,4249.63 v1(4765,4249.63)
  Top Layer w10.04: CN8.4@3590.7,4495.53 3634.1,4495.53 v1(3665,4464.63)
  Top Layer w15.75: C1.2@3630,4392.19 3642.6,4392.23 3652.4,4402.03 U12.1@3683.8,4402.03 ; C17.2@3630.3,4717.03 3642.6,4717.03 3652.4,4707.23 3683.5,4707.23 3722.6,4707.23 3735,4719.63 3735,4764.63 3717.6,4782.03 U1.1@3693.8,4782.03 ; v1(3665,4464.63) 3665,4444.63 3693.5,4416.13 3693.5,4402.03 3722.6,4402.03 3735,4389.63 3735,4344.63 3717.6,4327.23 3693.5,4327.23 3693.5,4316.13 3717.5,4292.13 3717.5,4259.63 3715,4257.13 3715,4204.63 3765,4154.63 3825,4154.63 3875,4104.63 pad.5@3875,4014.63 3875,3844.63 3890,3829.63 4155,3829.63 ; U1.3@3693.8,4707.23 v1(3722.4,4707.23) 3772.3,4657.33 3772.3,4639.63 3865,4639.63 v1(3910,4684.63) ; pad.5@4045,5094.63 pad.5@4045,5209.63 4045,5234.63 v1(4045,5279.63) ; pad.5@4155,3894.63 4155,3829.63 ; 4315,3829.63 pad.5@4315,3894.63 ; pad.5@4515,4014.63 v1(4575,4014.63) 4575,3939.63 4555,3919.63 pad.5@4555,3894.63 4555,3859.63 4525,3829.63 4155,3829.63
  Inner1 w10: v1(4100,4709.63) 4145,4664.63 4145,4569.63 v1(4265,4449.63) ; v1(4521.06,4749.7) 4586,4814.63 4735,4814.63 v1(4735,4859.63)
  Inner1 w15.75: v1(4735,4859.63) 4735,4279.63 v1(4765,4249.63)
  Inner2 w10.08: 4100,4774.63 4175,4849.63 4495,4849.63 4521.1,4823.53 v1(4521.06,4749.7)
  Inner2 w15.75: v1(3665,4464.63) 3665,4524.63 3722.4,4582.03 v1(3722.4,4707.23) ; v1(4045,5279.63) 4045,5034.63 4070,5009.63 4070,4804.63 4100,4774.63 v1(4100,4709.63)
  Bottom Layer w10: v1(4100,4709.63) 4105,4714.63 4165,4714.63 4174.8,4724.43 U9.3@4174.84,4756.83 ; U9.24@4226.02,4532.42 4226,4493.63 4240,4479.63 4240,4474.63 v1(4265,4449.63) 4290.3,4449.63 R23.2@4300.34,4459.63 4302.8,4459.63 U9.21@4302.8,4532.42 ; R21.1@4404.66,4859.63 4485,4859.63 4521.1,4823.53 v1(4521.06,4749.7)
  Bottom Layer w13.78: D2.2@3955,4739.63 3995,4739.63 4025,4709.63 v1(4100,4709.63)
  Bottom Layer w15.75: v1(3910,4684.63) 3910,4701.43 D2.2@3953.21,4744.63 ; CN7.1@4513.4,3976.53 4536.9,3976.53 v1(4575,4014.63) 4580,4019.63 D1.2@4580,4051.42 4613.2,4084.63 4710,4084.63 4765,4139.63 v1(4765,4249.63)
+10V: C10.2 C11.2 CN1.6 L1.2 pad.5@3755,3894.63 pad.5@3805,5209.63 R9.2 | length 1973.6
  Top Layer w15.75: v1(3740,5179.63) 3790,5179.63 3805,5194.63 pad.5@3805,5209.63 ; v1(3745,4054.63) 3745,3904.63 pad.5@3755,3894.63
  Inner2 w15.75: v1(3740,5179.63) 3755,5179.63 3755,4064.63 v1(3745,4054.63)
  Bottom Layer w15.75: C10.2@3740,4114.63 3745,4109.63 v1(3745,4054.63) 3796.6,4003.03 CN1.6@3796.6,3976.53 ; C10.2@3765.63,4114.63 3844.4,4193.33 C11.2@3844.37,4194.63 3844.4,4304.33 R9.2@3875,4334.93
  Bottom Layer w23.62: L1.2@3630,4125.89 3630,4114.63 3740,4114.63 C10.2@3765.63,4114.63 ; C10.2@3765.6,4109.63 C10.2@3765.63,4114.63
AT_CS: R21.2 U6.86 U9.8 | length 180
  Top Layer w10: v1(4295,4804.63) 4314.4,4824.03 U6.86@4314.37,4859.74
  Bottom Layer w10: U9.8@4302.8,4766.83 4302.8,4796.83 v1(4295,4804.63) 4345.3,4854.93 R21.2@4345.34,4859.63
AT_MISO: U6.84 U9.11 | length 117.1
  Top Layer w10: U6.84@4353.74,4859.74 4353.7,4825.93 4375,4804.63 v1(4380,4804.63)
  Bottom Layer w10: U9.11@4379.57,4756.83 4379.6,4804.63 v1(4380,4804.63)
AT_MOSI: U6.85 U9.9 | length 105.3
  Top Layer w10: v1(4330,4804.63) 4334.1,4808.73 U6.85@4334.06,4859.74
  Bottom Layer w10: U9.9@4328.39,4756.83 4328.4,4803.03 v1(4330,4804.63)
AT_SCK: U6.82 U9.10 | length 201.9
  Top Layer w10: U6.82@4393.11,4859.74 4393.1,4826.53 v1(4415,4804.63)
  Bottom Layer w10: U9.10@4353.98,4756.83 4354,4818.63 4365,4829.63 4390,4829.63 v1(4415,4804.63)
BB: pad.5@4475,3894.63 Q2.3 | length 214.8
  Top Layer w10: pad.5@4475,3894.63 v1(4475,4094.63)
  Bottom Layer w10: Q2.3@4460.25,4094.63 v1(4475,4094.63)
BEEPER: R31.1 U6.48 | length 261.4
  Top Layer w10: v1(4470,4304.63) 4471.9,4302.73 U6.48@4471.9,4249.53
  Inner1 w10: v1(4470,4304.63) 4475,4299.63 v1(4475,4144.63)
  Bottom Layer w10: v1(4475,4144.63) 4495.3,4124.33 R31.1@4510,4124.3
BOOT0: R17.1 SW1.1 U6.94 | length 949.2
  Top Layer w10: R17.1@4729.66,4659.63 v1(4775,4659.63)
  Top Layer w10.08: U6.94@4156.89,4859.74 4156.9,4817.73 4215,4759.63 4490,4759.63 4550,4819.63 4650,4819.63 4675,4794.63 4740,4794.63 4775,4759.63 v1(4775,4659.63)
  Bottom Layer w10: v1(4775,4659.63) 4805.1,4629.53 SW1.1@4805.11,4601.98
BOX_CS: U6.87 U10.1 | length 455.2
  Top Layer w10: U10.1@4276.23,5224.63 4265,5224.63 4240,5199.63 4240,5164.63 4255,5149.63 4305,5149.63 4315,5139.63 4315,4919.63 4294.7,4899.33 U6.87@4294.69,4859.74
BOX_MISO: U6.79 U10.2 | length 457.4
  Top Layer w10: U10.2@4276.23,5174.63 4320,5174.63 4345,5149.63 4345,5054.63 4360,5039.63 4435,5039.63 4452.2,5022.43 U6.79@4452.17,4859.74
BOX_MOSI: U6.80 U10.5 | length 358.2
  Top Layer w10: v1(4425,5004.63) 4425,4979.63 4432.5,4972.13 U6.80@4432.48,4859.74 ; v1(4500,5004.63) 4545,5004.63 4593.8,5053.43 U10.5@4593.77,5074.63
  Bottom Layer w10: v1(4425,5004.63) v1(4500,5004.63)